# Altium PCB old_GR_Alim.PcbDoc
Units mm, origin at the board's own origin, x right, y up, seen from the top; angles counter-clockwise.
Board outline 70 x 80 mm, 2 copper layers (Top Layer, Bottom Layer); 65 components, 33 nets, 153 pads, 15 vias.
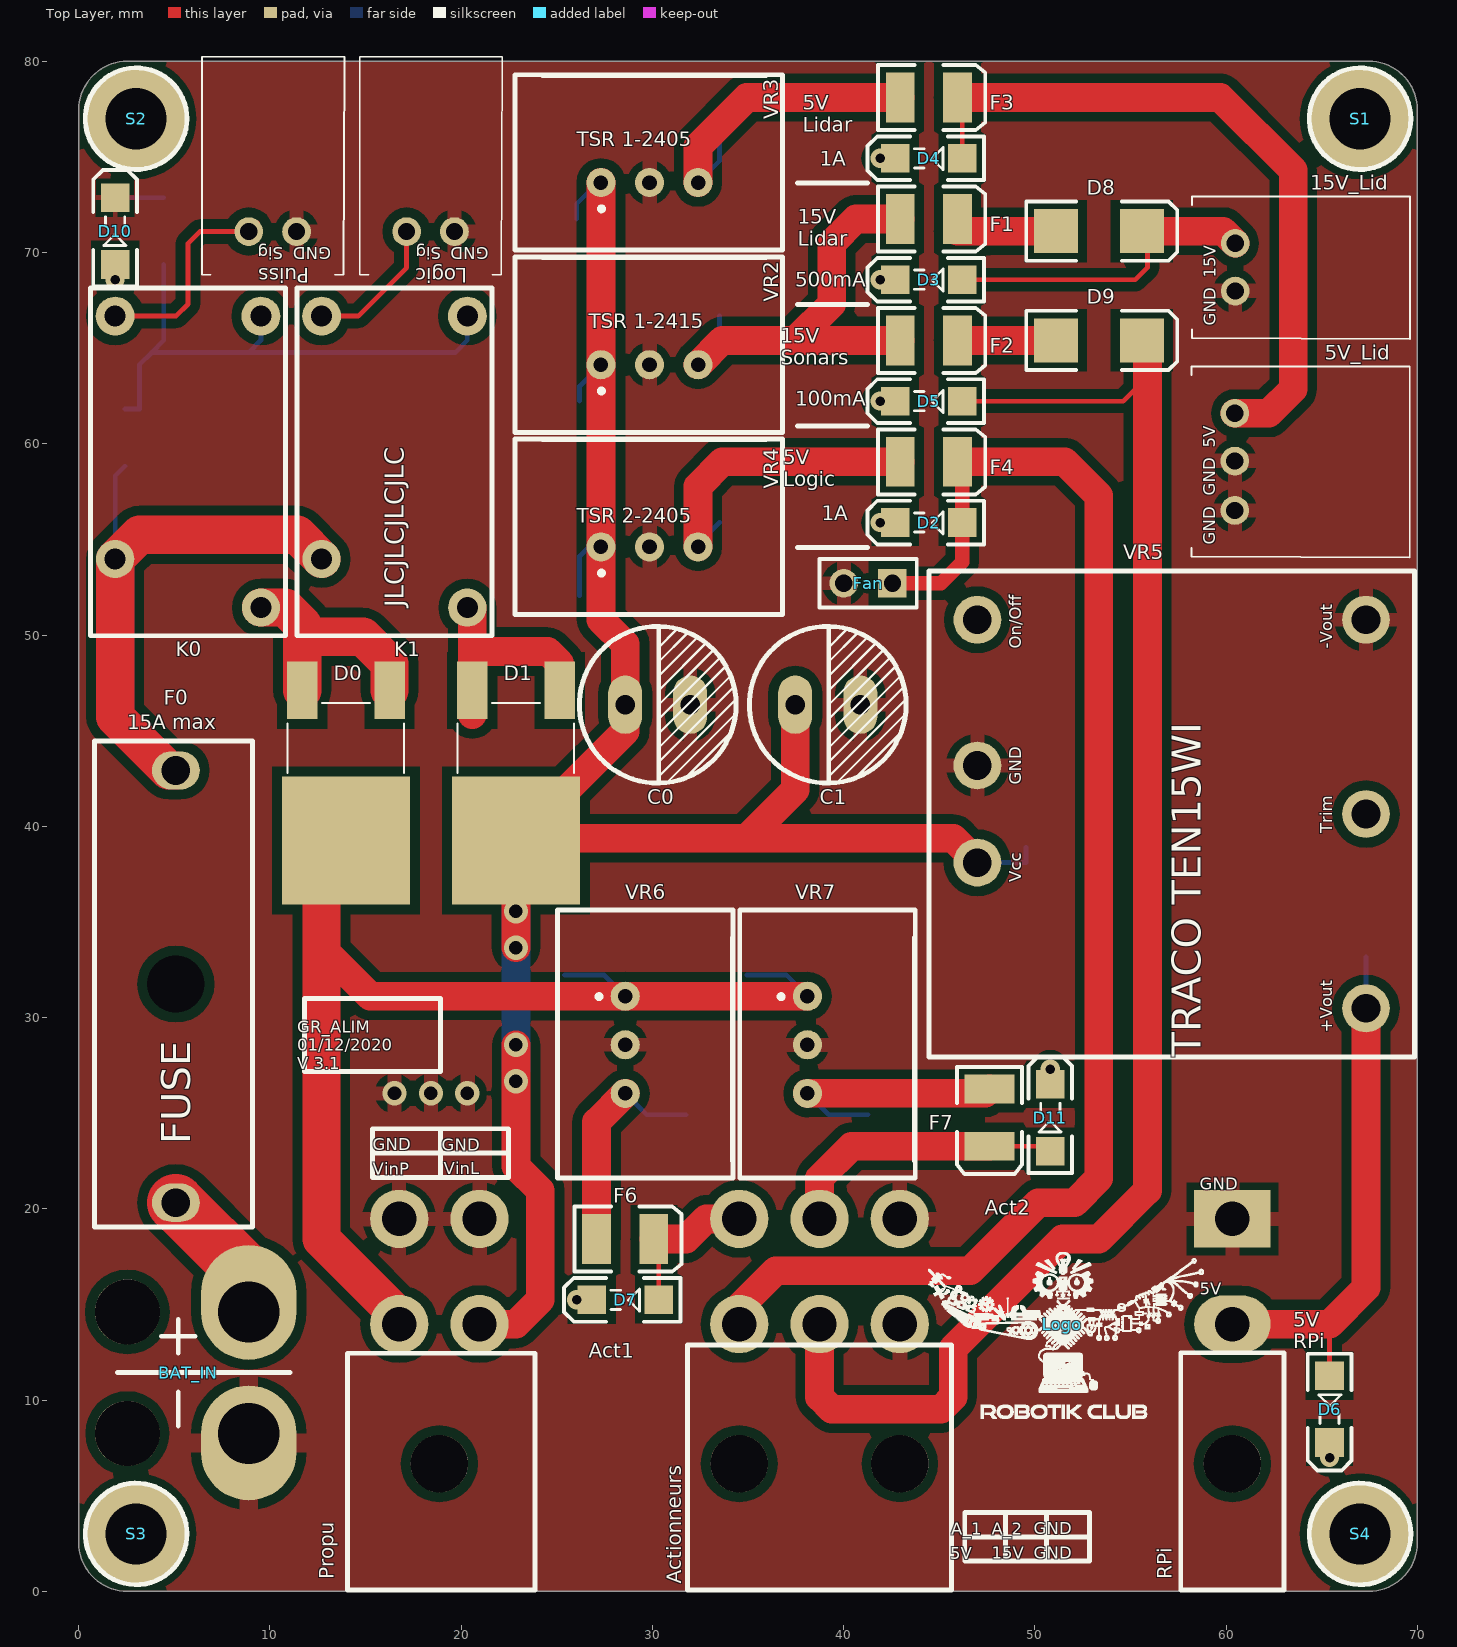
[diagram p0: Top Layer view]
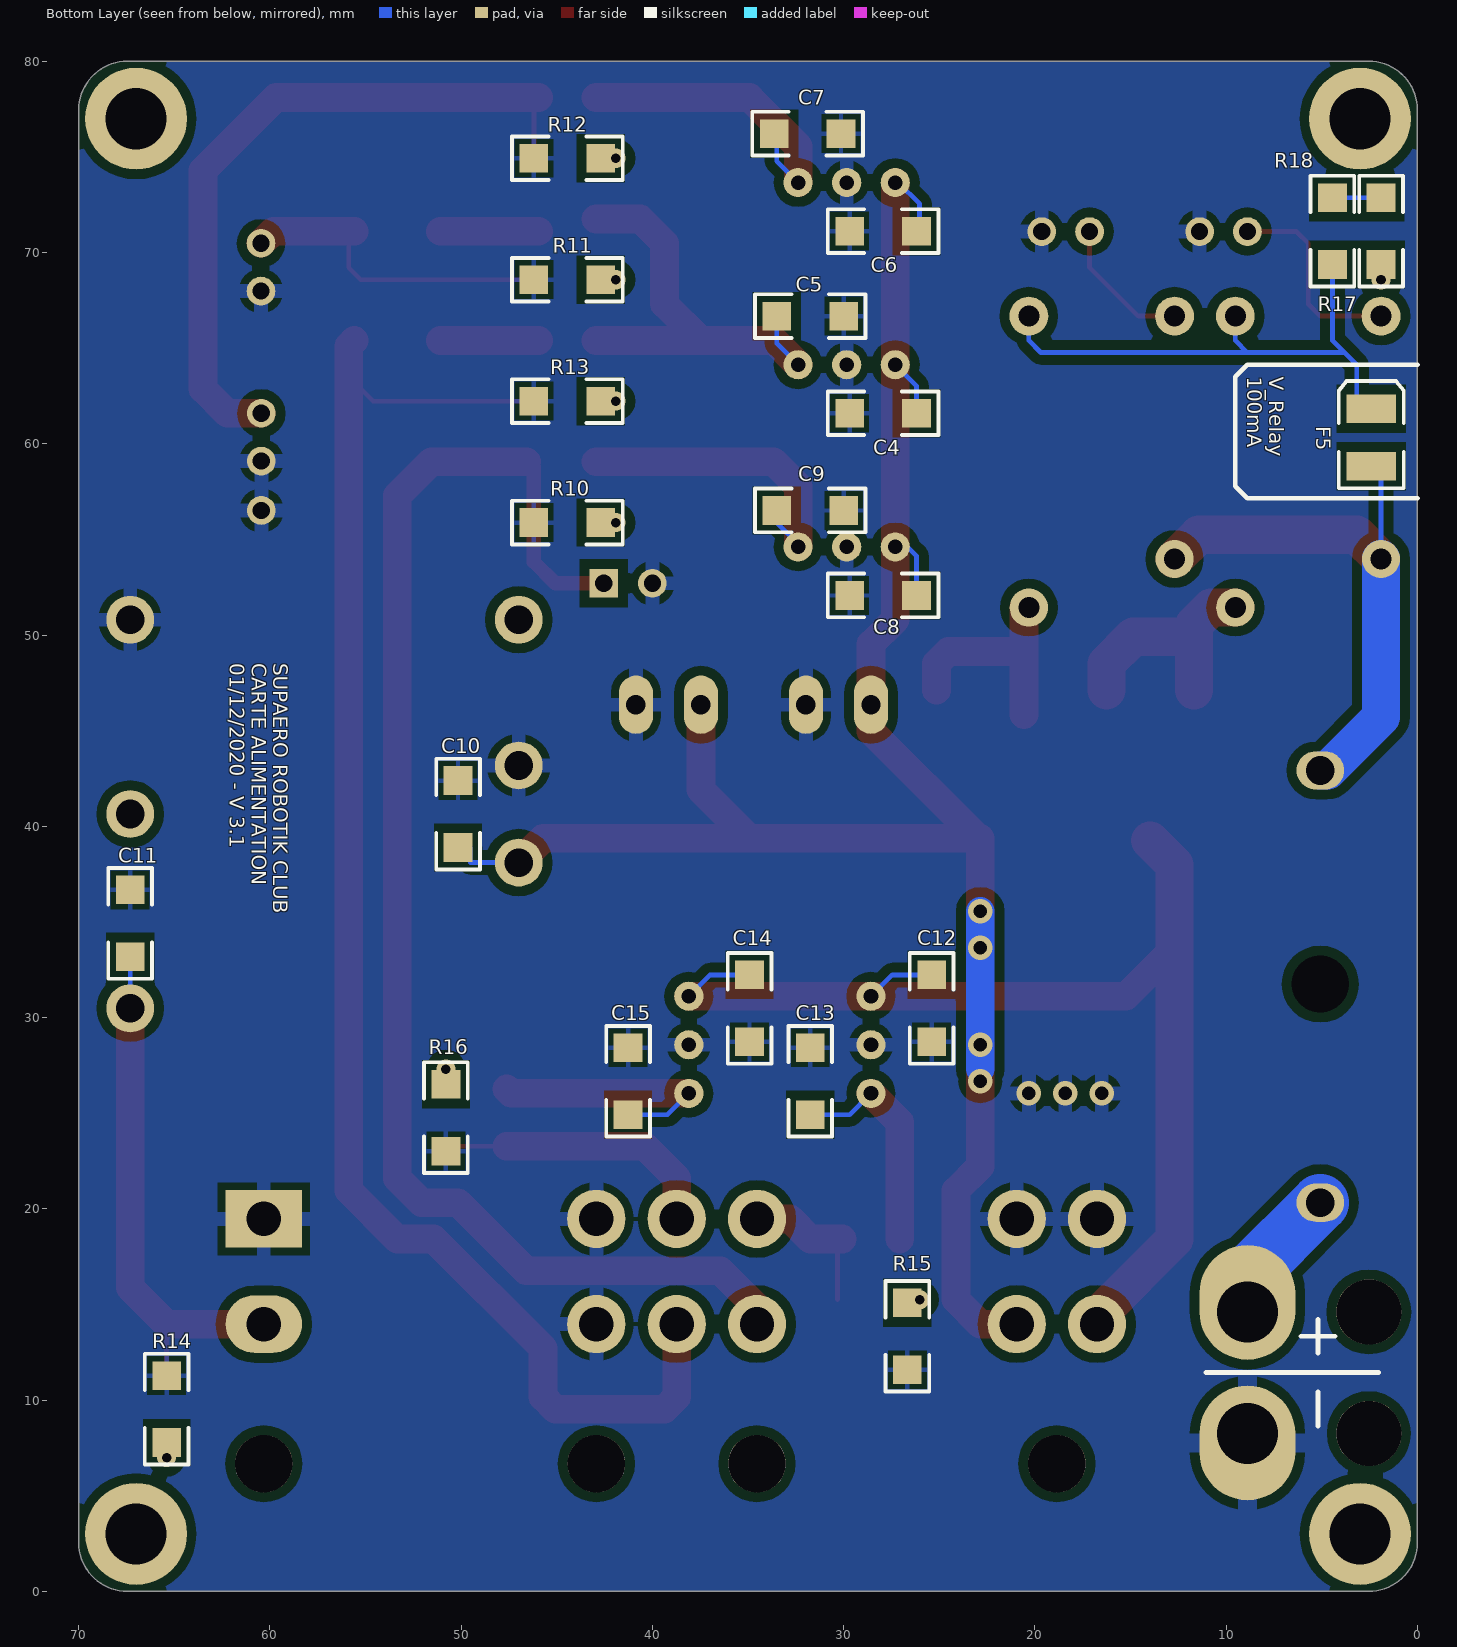
[diagram p1: Bottom Layer view, seen from below]

## Layer stack, top to bottom
Top Solder: solder mask 0.0102, Solder Resist, Dk 3.5
Top Layer: signal copper 0.0356
Dielectric 1: dielectric 0.32, FR-4, Dk 4.8
Bottom Layer: signal copper 0.0356
Bottom Solder: solder mask 0.0102, Solder Resist, Dk 3.5

## Board outline
32,0 67.46,0 ccw(c67.46,2.54) 70,2.54 70,14 70,77.46 ccw(c67.46,77.46) 67.46,80 50,80 2.54,80 ccw(c2.54,77.46) 0,77.46 0,35 0,2.54 ccw(c2.54,2.54) 2.54,0 32,0

## Design rules (kind name [scope] priority, off if disabled: settings)
Clearance [All] p1: gap=0.254 ignorepadtopadclearanceinfootprint=TRUE except(0.5: Arc-Poly Track-Poly SMDPad-Poly THPad-Poly Via-Poly Fill-Poly Poly-Poly Poly-Region Poly-Text)
ComponentClearance ComponentClearance_Logo [HasFootprint('Logo_Highres') Or  HasFootprint('Logo_lowres')] p1: gap=0 collisioncheckmode=3 verticalgap=0 showdistances=FALSE
ComponentClearance Bat [HasFootprint('Battery SALE')] p2: gap=0 collisioncheckmode=3 verticalgap=0 showdistances=FALSE
ComponentClearance Res [HasFootprint('3.2X1.6X1.1')] p3: gap=0 collisioncheckmode=3 verticalgap=0 showdistances=FALSE
ComponentClearance [All] p4: gap=0.254 collisioncheckmode=3 verticalgap=0.254 showdistances=FALSE
PlaneConnect [All] p1: planeconnectstyle=Relief reliefexpansion=0.5 reliefentries=4 reliefconductorwidth=0.5 reliefairgap=0.4
PolygonConnect PolygonConnect_Res [HasFootprint('KP-3216SEC') Or HasFootprint('Resistor 1206') Or HasFootprint('Capacitor 1206')] p1: connectstyle=Relief reliefconductorwidth=0.254 reliefentries=4 polygonreliefangle="90 Angle" airgapwidth=0.254
PolygonConnect PolygonConnect_Bat [HasFootprint('Battery SALE')] p2: connectstyle=Relief reliefconductorwidth=1 reliefentries=4 polygonreliefangle="90 Angle" airgapwidth=0.5
PolygonConnect PolygonConnect_1 [All] p3: connectstyle=Relief reliefconductorwidth=0.75 reliefentries=4 polygonreliefangle="90 Angle" airgapwidth=0.4
RoutingVias [All] p1: holewidth=0.711 width=1.27 viastyle="Through Hole" minholewidth=0.711 minwidth=1.27 maxholewidth=0.711 maxwidth=1.27
SilkToSilkClearance [All] p1 off: silktosilkclearance=0.254
SilkToSolderMaskClearance [IsPad] p1 off: minsilkscreentomaskgap=0.254 clearancetoexposedcopper=TRUE
SolderMaskExpansion [All] p1: expansion=0.102 istentingtop=FALSE
Width [All] p1: maxlimit=5 minlimit=0.25 preferedwidth=0.25
26 further rules are at their usual default settings.

## Classes and differential pairs
net class Power: 5V_L 5V_LID 5V_PI 15V_L 15V_LID 15V_S A_1 A_2 GND V_BAT V_REL VIN_L VIN_P

## Components (designator, comment, footprint, x,y, rotation, side; value= is the part's Value field where it differs from the comment)
5V_Lid "Header 3H" S3B-XH-A 60.452,61.595 r270 top
15V_Lid "Header 2H" S2B-XH-A 60.47,70.485 r270 top
Actionneurs "MinifitJr 3x2H" MOLEX_MINIFITJR_3X2H 38.735,13.97 r0 top
BAT_IN "Battery Onboard Solder" "BATTERY SALE" 8.89,8.255 r90 top
C0 "Cap2" CONDENSATEUR 28.575,46.355 r0 top
C1 "Cap2" CONDENSATEUR 37.465,46.355 r0 top
C4 "Cap" "Capacitor 1206" 27.94,61.595 r180 bottom
C5 "(optional)" "Capacitor 1206" 31.75,66.675 r0 bottom
C6 "Cap" "Capacitor 1206" 27.94,71.12 r180 bottom
C7 "(optional)" "Capacitor 1206" 31.889,76.217 r0 bottom
C8 "Cap" "Capacitor 1206" 27.94,52.07 r180 bottom
C9 "(optional)" "Capacitor 1206" 31.75,56.515 r0 bottom
C10 "Cap" "Capacitor 1206" 50.165,40.64 r270 bottom
C11 "Cap" "Capacitor 1206" 67.31,34.925 r270 bottom
C12 "Cap" "Capacitor 1206" 25.4,30.48 r90 bottom
C13 "(optional)" "Capacitor 1206" 31.75,26.67 r270 bottom
C14 "Cap" "Capacitor 1206" 34.925,30.48 r90 bottom
C15 "(optional)" "Capacitor 1206" 41.275,26.67 r270 bottom
D0 "FERD20S100SB-TR" FERD20H100SBTR 13.97,43.18 r90 top
D1 "FERD20S100SB-TR" FERD20H100SBTR 22.86,43.18 r90 top
D2 "5V_L" KP-3216SEC 44.45,55.88 r180 top
D3 "15V_Lid" KP-3216SEC 44.45,68.58 r180 top
D4 "5V_Lid" KP-3216SEC 44.45,74.93 r180 top
D5 "15V_S" KP-3216SEC 44.45,62.23 r180 top
D6 "5V_L" KP-3216SEC 65.405,9.525 r270 top
D7 "A_1" KP-3216SEC 28.575,15.24 r180 top
D8 "LGE SS12" SMB 53.34,71.12 r90 top
D9 "LGE SS12" SMB 53.34,65.405 r90 top
D10 "V_Rel" KP-3216SEC 1.905,71.12 r90 top
D11 "A_2" KP-3216SEC 50.8,24.765 r90 top
F0 "15A max" FUSE 5.08,20.32 r90 top
F1 "500mA" 3.5X2.8X1.9 44.45,71.755 r0 top
F2 "100mA" 3.5X2.8X1.9 44.45,65.405 r0 top
F3 "1A" 3.5X2.8X1.9 44.45,78.105 r0 top
F4 "1A" 3.5X2.8X1.9 44.45,59.055 r0 top
F5 "100mA" 3.5X2.8X1.9 2.413,60.325 r90 bottom
F6 "Fuse 2" 3.5X2.8X1.9 28.575,18.415 r0 top
F7 "Fuse 2" 3.5X2.8X1.9 47.625,24.765 r270 top
Fan "Header 2" HDR1X2 42.545,52.705 r180 top
K0 "Relay-SPST" Relay 5.715,59.055 r0 top
K1 "Relay-SPST" Relay 16.51,59.055 r0 top
Logic "S2B-XH-A-1_LF__SN_" S2B-XH-A 17.145,71.095 r0 top
Logo "Comment" Logo_lowres 51.435,13.97 r0 top
Propu "MinifitJr 2X2H" MOLEX_MINIFITJR_2X2H 20.955,13.97 r0 top
Puiss "S2B-XH-A-1_LF__SN_" S2B-XH-A 8.89,71.095 r0 top
R10 "Res2" "Resistor 1206" 44.45,55.88 r180 bottom
R11 "Res2" "Resistor 1206" 44.45,68.58 r180 bottom
R12 "Res2" "Resistor 1206" 44.45,74.93 r180 bottom
R13 "Res2" "Resistor 1206" 44.45,62.23 r0 bottom
R14 "Res2" "Resistor 1206" 65.405,9.525 r90 bottom
R15 "Res2" "Resistor 1206" 26.67,13.335 r270 bottom
R16 "Res2" "Resistor 1206" 50.8,24.765 r270 bottom
R17 "Res2" "Resistor 1206" 1.905,71.12 r270 bottom
R18 "Res2" "Resistor 1206" 4.445,71.12 r90 bottom
RPi "Header 2H" Molex_MiniFitJr_2x1H 60.325,13.97 r270 top
S1 "Screw M3" "Screw M3" 67,77 r0 top
S2 "Screw M3" "Screw M3" 3,77 r0 top
S3 "Screw M3" "Screw M3" 3,3 r0 top
S4 "Screw M3" "Screw M3" 67,3 r0 top
VR2 "TSR 1-2415" "TRS - Both" 27.305,64.135 r180 top
VR3 "TSR 1-2405" "TRS - Both" 27.305,73.66 r180 top
VR4 "TSR 2-2405" "TRS - Both" 27.305,54.61 r180 top
VR5 "THN15WI-2411" TRACO_1X1INCH 46.99,38.1 r90 top
VR6 "TSR 1-2405" "TRS - Both" 28.575,31.115 r90 top
VR7 "TSR 2-2405" "TRS - Both" 38.1,31.115 r90 top

## Footprints (in the part's own frame and the unit in brackets; to place one, negate y for a bottom-side part, rotate by r counter-clockwise, add the part's x,y. Pads: shape width x height; smd on the part's side, far side on the other; paste and mask are expansions set on the pad)
3.5X2.8X1.9 [mm] "SM LED; 2 C-Bend Leads; Body 3.5 x 2.8 x 1.9 mm, inc leads (LxWxH typ)"
  rect 1.5x2.6 smd: 1(-1.5,0) 2(1.5,0)
  silkscreen extent -2.65,-1.7 2.95,1.7
"BATTERY SALE" [mm] "Connecteur Batterie"
  round 3.4 hole 3.4: 0(0,6.35) 0(6.35,6.35)
  oval 6x5 hole 3.2 copper offset -0.5,0: 1(0,0)
  oval 6x5 hole 3.2 copper offset 0.5,0: 2(6.35,0)
  silkscreen extent 0.38,-2.16 5.97,6.86
"Capacitor 1206" [mm]
  rect 1.5x1.5 smd: 1(-1.75,0) 2(1.75,0)
  silkscreen extent -2.89,-1.14 2.89,1.14, body extent -1.98,-0.99 1.98,0.96, height 1.3
CONDENSATEUR [mil]
  oval 70x120 hole 40: 1(0,0) 2(133.86,0)
  silkscreen extent -94,-161 228,161, body extent -93,-160 227,160, height 500
FERD20H100SBTR [mm]
  rect 3x1.6 smd: 1(3.925,-2.286) 3(3.925,2.286)
  rect 6.7x6.7 smd: 2(-3.925,0)
  silkscreen extent -0.4,-3.05 3.27,3.05, body extent -4.99,-3.2 3.71,3.3, height 2.3
FUSE [mm] "Porte-fusible monté sur circuit 10 (UL) A, 6.3 (VDE) A, fusible Cartouche, 893-0574"
  round 2 hole 3: 0(11.43,0)
  oval 2x2.5 hole 1.5: 1(0,0) 2(22.6,0)
  silkscreen extent -1.27,-4 24.13,4.25, body extent -1.27,-4.29 24.13,4.29, height 11.41
HDR1X2 [mm] "Connector; Header; 2 Position"
  rect 1.5x1.5 hole 0.9: 1(0,0)
  round 1.5 hole 0.9: 2(2.54,0)
  silkscreen extent -1.27,-1.27 3.81,1.27
KP-3216SEC [mm]
  rect 1.5x1.5 smd: 1(-1.75,0) 2(1.75,0)
  silkscreen extent -2.89,-1.14 3.2,1.14, body extent -1.7,-0.79 1.5,0.81, height 1.1
Logo_lowres [mm]
  silkscreen extent -7.01,-4.93 7.39,3.76
Molex_MiniFitJr_2x1H [mm] "Connecteur Molex 2"
  rect 3x4 hole 1.8: 1(-5.5,0)
  oval 3x4 hole 1.8: 2(0,0)
  round 3 hole 3 unplated: 3(7.3,0)
  silkscreen extent 1.5,-2.7 13.9,2.7, body extent -6.03,-2.7 13.9,3.1, height 11.01
MOLEX_MINIFITJR_2X2H [mm] "MOLEX_MINIFITJR_3X2, 39-30-1060"
  round 3.048 hole 1.8: 1(-4.2,5.5) 2(-4.2,0) 3(0,5.5) 4(0,0)
  round 3 hole 3 unplated: 10(-2.1,-7.3)
  silkscreen extent -6.9,-13.9 2.9,-1.52, body extent -6.88,-13.9 3.12,6.03, height 11.4
MOLEX_MINIFITJR_3X2H [mm] "MOLEX_MINIFITJR_3X2H, 39-30-1060"
  round 3.048 hole 1.8: 1(-4.2,5.5) 2(-4.2,0) 3(0,5.5) 4(0,0) 5(4.2,5.5) 6(4.2,0)
  round 3 hole 3 unplated: 10(-4.2,-7.3) 11(4.2,-7.3)
  silkscreen extent -6.9,-13.9 6.9,-1.1, body extent -6.9,-13.9 7.3,6.04, height 11.41
Relay [mm] "SPST-NO Relay"
  round 2 hole 1.1: 1(3.81,-7.62) 2(-3.81,-5.08)
  round 2.032 hole 1.1: 3(-3.81,7.62) 4(3.81,7.62)
  silkscreen extent -5.09,-9.09 5.09,9.09, body extent -5.08,-9.14 5.08,9.14, height 15
"Resistor 1206" [mm]
  rect 1.5x1.5 smd: 1(-1.75,0) 2(1.75,0)
  silkscreen extent -2.89,-1.14 2.89,1.14, body extent -1.98,-0.95 1.98,0.93, height 0.55
S2B-XH-A [mm]
  round 1.5 hole 0.9: 1(0,0) 2(2.5,0)
  silkscreen extent -2.45,-2.26 5,9.14, body extent -2.41,-2.32 4.99,9.18, height 6.15
S3B-XH-A [mm]
  round 1.5 hole 0.9: 1(0,0) 2(2.5,0) 3(5.08,0)
  silkscreen extent -2.45,-2.26 7.54,9.14, body extent -2.44,-2.27 7.46,9.23, height 6.15
"Screw M3" [mm] "M3 iso Screw"
  round 5.32 hole 3.2 unplated: 0(0,0)
  silkscreen extent -2.66,-2.66 2.66,2.66
SMB [mm] "SMB Didoe"
  rect 2.3x2.3 smd: 1(0,2.25) 2(0,-2.25)
  silkscreen extent -1.55,-4.1 1.55,3.8, body extent -1.84,-2.67 1.78,2.62, height 2.2
TRACO_1X1INCH [mm]
  round 2.5 hole 1.5: 1(0,0) 2(5.08,0) 3(-7.62,-20.32) 4(2.54,-20.32) 5(12.7,-20.32) 6(12.7,0)
  silkscreen extent -10.16,-22.86 15.24,2.54, body extent -10.16,-22.86 15.24,2.54, height 10.11
"TRS - Both" [mil]
  round 60 hole 30: 1(0,0) 2(-100,0) 3(-200,0)
  silkscreen extent -374,-222 177,139, body extent -374,-157 177,138, height 398

## Part data
5V_Lid: "Header, 3-Pin, Right Angle"
15V_Lid RPi: "Header, 2-Pin, Right Angle"
Actionneurs: library part "Header 3X2H", "Header, 3-Pin, Dual row, Right Angle"
BAT_IN: library part "Header 2", "Header, 2-Pin"
C0 C1 C4 C6 C8 C10 C11 C12 C14: "Capacitor"
C5 C7 C9 C13 C15: library part Cap, "Capacitor"
D0 D1: "Diode"
D2 D3 D4 D5 D6 D7 D10 D11: library part LED2, "Typical RED, GREEN, YELLOW, AMBER GaAs LED"
D8 D9: library part Diode, "Default Diode"
F0: library part "Fuse 2", "Main Fuse"
F1 F3 F4 F5: library part "Fuse 2", "Fuse"
F2: library part "Fuse 2", "MICROSMD010F-2"
F6 F7: "Fuse"
Fan: "Header, 2-Pin"
K0 K1: "Single-Pole Single-Throw Relay"
Logic Puiss: "Connector"
Propu: library part "Header 2X2H", "Header, 2-Pin, Dual row, Right Angle"
R10 R11 R12 R13 R14 R15 R16 R17 R18: "Resistor"
VR2 VR3 VR4 VR6 VR7: library part "Volt Reg", "Voltage Regulator"
VR5: library part TEN60N, "TRACO THN15WI-2411"

## Via types
v1: diameter 1, hole 0.5, Top Layer to Bottom Layer, 8 vias
v2: diameter 1.27, hole 0.711, Top Layer to Bottom Layer, 7 vias

## Nets (pads, with @x,y where several pads share a name; then routed paths per layer and width w, separated by ;. In a path a pad name is that pad's centre, name@x,y a point inside that pad or via, vN(x,y) a via of type N, cw(c..) or ccw(c..) an arc to the next point about the centre after c; other vN are vias at no path point)
5V_L: Actionneurs.2 D2.1 F4.2 Fan.1 | length 74.8
  Top Layer w0.75: Fan.1 45.085,52.705 46.2,53.82 D2.1 F4.2@46.2,58.805
  Top Layer w1.5: Actionneurs.2 34.535,14.85 36.449,16.764 46.609,16.764 50.165,20.32 52.07,20.32 53.34,21.59 53.34,57.277 51.562,59.055 F4.2@46.585,59.055
5V_LID: 5V_Lid.1 D4.1 F3.2 | length 37.4
  Top Layer w0.25: F3.2 46.2,77.855 D4.1
  Top Layer w1.5: F3.2 59.69,78.105 63.5,74.295 63.5,62.865 62.23,61.595 5V_Lid.1
5V_PI: C11.2 D6.1 RPi.2 VR5.3 | length 27.8
  Top Layer w0.25: D6.1 65.405,13.97
  Top Layer w1.5: RPi.2 65.405,13.97 67.31,15.875 VR5.3
  Bottom Layer w0.25: VR5.3 C11.2
15V_L: C5.2 F1.1 F2.1 VR2.3 | length 24.1
  Top Layer w1.5: VR2.3 33.655,65.405 37.465,65.405 ; F2.1 37.465,65.405 ; F1.1 40.64,71.755 39.37,70.485 39.37,67.31 37.465,65.405
  Bottom Layer w0.25: VR2.3 33.5,65.25 C5.2
15V_LID: 15V_Lid.1 D3.1 D8.2 | length 17.1
  Top Layer w0.25: D3.1 55.245,68.58 55.88,69.215 55.88,70.83 D8.2
  Top Layer w1.5: D8.2 59.835,71.12 15V_Lid.1
15V_S: Actionneurs.4 D5.1 D9.2 | length 82.2
  Top Layer w0.25: D5.1 54.61,62.23 55.88,63.5
  Top Layer w1.5: Actionneurs.4 38.735,10.16 39.37,9.525 45.085,9.525 45.72,10.16 45.72,12.7 51.435,18.415 53.34,18.415 55.88,20.955 55.88,65.115 D9.2
A_1: Actionneurs.1 D7.1 F6.2 | length 7.8
  Top Layer w0.25: D7.1 F6.2@30.325,18.165
  Top Layer w1.5: F6.2 31.75,18.415 32.805,19.47 Actionneurs.1
A_2: Actionneurs.3 D11.1 F7.2 | length 14.6
  Top Layer w0.25: F7.2 D11.1@50.55,23.265
  Top Layer w1.5: Actionneurs.3 38.735,21.59 40.41,23.265 F7.2
GND: 5V_Lid.2 5V_Lid.3 15V_Lid.2 Actionneurs.5 Actionneurs.6 BAT_IN.1 C0.2 C1.2 C4.1 C5.1 C6.1 C7.1 C8.1 C9.1 C10.1 C11.1 C12.1 C13.1 C14.1 C15.1 D10.2 Fan.2 Logic.2 Propu.1 Propu.3 Puiss.2 R10.1 R11.1 R12.1 R13.2 R14.2 R15.2 R16.2 RPi.1 VR2.2 VR3.2 VR4.2 VR5.2 VR5.5 VR6.2 VR7.2
  other v2: 16.51,26.035 18.415,26.035 20.32,26.035
NetBAT_IN_2: BAT_IN.2 F0.1 | length 14.6
  Top Layer w0.5: BAT_IN.2 BAT_IN.2@8.89,16.51
  Top Layer w3: F0.1 BAT_IN.2@8.89,16.51
  Bottom Layer w3: F0.1 8.89,16.51 BAT_IN.2
NetC7_2: C7.2 F3.1 VR3.3 | length 16.5
  Top Layer w1.5: VR3.3 32.385,75.565 34.925,78.105 F3.1
  Bottom Layer w0.25: VR3.3 33.5,74.775 C7.2@33.5,76.2
NetC9_2: C9.2 F4.1 VR4.3 | length 16
  Top Layer w1.5: VR4.3 32.385,57.785 33.655,59.055 F4.1
  Bottom Layer w0.25: VR4.3@32.307,54.687 C9.2@33.5,55.88
NetC13_2: C13.2 F6.1 VR6.3 | length 11.9
  Top Layer w1.5: F6.1 27.075,24.535 VR6.3
  Bottom Layer w0.25: VR6.3 29.69,24.92 C13.2
NetC15_2: C15.2 F7.1 VR7.3 | length 13.3
  Top Layer w1.5: VR7.3 47.395,26.035 F7.1
  Bottom Layer w0.25: VR7.3 39.215,24.92 C15.2
NetD0_1: D0.1 D0.3 K0.1 | length 12.5
  Top Layer w2: K0.1 10.795,51.435 11.684,50.546 D0.3 ; 11.684,49.911 14.859,49.911 16.256,48.514 D0.1
NetD1_1: D1.1 D1.3 K1.1 | length 12.2
  Top Layer w1.5: K1.1 K1.1@20.574,51.204 ; D1.3@20.574,45.835 K1.1@20.574,51.435 ; 20.574,49.143 24.517,49.143 25.146,48.514 D1.1
NetD2_2: D2.2 R10.2
  other v1: 41.91,55.88
NetD3_2: D3.2 R11.2
  other v1: 41.91,68.58
NetD4_2: D4.2 R12.2
  other v1: 41.91,74.93
NetD5_2: D5.2 R13.1
  other v1: 41.91,62.23
NetD6_2: D6.2 R14.1
  other v1: 65.405,6.985
NetD7_2: D7.2 R15.1
  other v1: 26.035,15.24
NetD8_1: D8.1 F1.2 | length 5.1
  Top Layer w1.5: F1.2@45.95,71.12 D8.1
NetD9_1: D9.1 F2.2 | length 5.1
  Top Layer w1.5: F2.2 D9.1
NetD10_1: D10.1 R17.2
  other v1: 1.905,68.58
NetD11_2: D11.2 R16.1
  other v1: 50.8,27.305
NetK0_3: K0.3 Puiss.1 | length 11.3
  Top Layer w0.25: K0.3 5.08,66.675 5.715,67.31 5.715,70.485 6.325,71.095 Puiss.1 Puiss.1@9.348,71.552
NetK1_3: K1.3 Logic.1 | length 7.8
  Top Layer w0.25: K1.3 14.605,66.675 17.145,69.215 Logic.1@17.145,71.526
NetR17_1: R17.1 R18.2 | length 2.5
  Bottom Layer w0.25: R17.1 R18.2
V_BAT: F0.2 F5.1 K0.2 K1.2 | length 42.1
  Top Layer w2: F0.2 4.705,42.92 1.905,45.72 K0.2 3.175,55.245 11.43,55.245 K1.2
  Bottom Layer w0.25: K0.2 1.905,58.317 F5.1
  Bottom Layer w2: K0.2 1.905,45.72 4.705,42.92 F0.2
V_REL: F5.2 K0.4 K1.4 R18.1 | length 29
  Bottom Layer w0.25: F5.2 3.175,61.825 3.175,64.135 3.81,64.77 ; R18.1 4.445,65.405 3.81,64.77 ; K0.4 9.525,65.405 8.89,64.77 ; K1.4 20.32,65.405 19.685,64.77 8.89,64.77 ; 3.81,64.77 8.89,64.77
VIN_L: C0.1 C1.1 C4.2 C6.2 C8.2 C10.2 D1.2 Propu.4 VR2.1 VR3.1 VR4.1 VR5.1 | length 112.8
  Top Layer w1.5: Propu.4 22.86,13.97 24.13,15.24 24.13,20.955 22.86,22.225 v2(22.86,28.575) ; v2(22.86,33.655) D1.2 D1.2@22.975,39.37 ; D1.2@22.86,39.37 D1.2@22.975,39.37 ; VR3.1 27.305,50.8 28.575,49.53 C0.1 28.575,44.97 D1.2@22.975,39.37 ; C1.1 37.465,41.91 34.925,39.37 ; VR5.1 45.72,39.37 34.925,39.37 ; D1.2@22.975,39.37 34.925,39.37
  Bottom Layer w0.25: C6.2@26.035,71.755 26.035,72.545 VR3.1@27.15,73.66 ; C8.2 26.19,54.13 26.67,54.61 VR4.1 ; C4.2@26.19,62.23 26.19,63.02 VR2.1 ; VR5.1 49.53,38.1 C10.2@49.53,38.89
  Bottom Layer w1.5: 22.86,27.305 v2(22.86,35.56)
  other v2: 22.86,26.67
VIN_P: C12.2 C14.2 D0.2 Propu.2 VR6.1 VR7.1 | length 60.5
  Top Layer w1.5: 12.7,33.655 15.24,31.115 VR6.1 VR7.1
  Top Layer w2: D0.2 12.7,37.985 12.7,33.655 12.7,18.415 Propu.2@16.51,14.605
  Bottom Layer w0.25: C12.2 27.46,32.23 VR6.1 ; C14.2 36.985,32.23 VR7.1
pads on no net: Actionneurs.10 Actionneurs.11 BAT_IN.0 F0.0 Propu.10 RPi.3 S1.0 S2.0 S3.0 S4.0 VR5.4 VR5.6

## Polygon pours and split planes (outlines as drawn)
GND on Top Layer "Top GND" (solid, pour order 4): 36.83,0 67.46,0 ccw(c67.46,2.54) 70,2.54 70,29 70,77.46 ccw(c67.46,77.46) 67.46,80 49,80 2.54,80 ccw(c2.54,77.46) 0,77.46 0,48 0,2.54 ccw(c2.54,2.54) 2.54,0 21,0
GND on Bottom Layer "Bot GND" (solid, remove dead copper, pour order 6): 36.83,0 67.46,0 ccw(c67.46,2.54) 70,2.54 70,29 70,77.46 ccw(c67.46,77.46) 67.46,80 49,80 2.54,80 ccw(c2.54,77.46) 0,77.46 0,48 0,2.54 ccw(c2.54,2.54) 2.54,0 21,0

## Silkscreen, mask and mechanical layers (free items; w line width, h text height)
Top Overlay:
  lines w0.254: 15.367,22.911 22.479,22.911 ; 18.923,21.641 18.923,24.181 ; 37.592,54.585 41.25,54.585 ; 37.592,60.935 41.25,60.935 ; 37.592,67.285 41.25,67.285 ; 37.592,73.635 41.25,73.635 ; 46.33,2.845 52.705,2.845 ; 48.463,1.575 48.463,4.115 ; 50.597,1.575 50.597,4.115 ; 11.811,27.178 11.811,30.988 18.923,30.988 18.923,27.178 11.811,27.178 ; 15.367,21.641 15.367,24.181 22.479,24.181 22.479,21.641 15.367,21.641 ; 46.33,1.575 52.857,1.575 52.857,4.115 46.33,4.115 46.33,1.575
  text "5V / Lidar" at 37.846,76.327 h0.76
  text "15V / Lidar" at 37.592,70.358 h0.76
  text "Sig" at 10.693,70.282 h0.64 r180
  text "GND" at 13.193,70.282 h0.64 r180
  text "Sig" at 18.948,70.282 h0.64 r180
  text "GND" at 21.448,70.282 h0.64 r180
  text "15V" at 59.454,68.682 h0.64 r90
  text "GND" at 59.454,66.182 h0.64 r90
  text "15V / Sonars" at 36.703,64.135 h0.76
  text "5V" at 59.436,59.792 h0.64 r90
  text "5V / Logic" at 36.83,57.785 h0.76
  text "GND" at 59.436,57.292 h0.64 r90
  text "GND" at 59.436,54.712 h0.64 r90
  text "JLCJLCJLCJLC" at 17,51.445 h1 r90
  text "GR_ALIM / 01/12/2020 / V 3.1" at 11.43,27.305 h0.64
  text "GND" at 15.367,23.063 h0.64
  text "GND" at 18.974,23.038 h0.64
  text "VinL" at 19.075,21.793 h0.64
  text "VinP" at 15.367,21.768 h0.64
  text "GND" at 58.623,20.994 h0.64
  text "Act2" at 47.371,19.685 h0.76
  text "5V" at 58.623,15.494 h0.64
  text "5V / RPi" at 63.5,12.7 h0.76
  text "Act1" at 26.67,12.22 h0.76
  text "GND" at 49.936,2.972 h0.64
  text "A_1" at 45.618,2.946 h0.64
  text "A_2" at 47.752,2.946 h0.64
  text "15V" at 47.752,1.702 h0.64
  text "GND" at 49.936,1.702 h0.64
  text "5V" at 45.568,1.676 h0.64
Bottom Overlay:
  lines w0.254: 0,57.15 8.89,57.15 9.525,57.785 9.525,63.5 8.89,64.135 0,64.135
  text "V_Relay / 100mA" at 8.89,63.5 h0.76 r90
  text "SUPAERO ROBOTIK CLUB / CARTE ALIMENTATION / 01/12/2020 - V 3.1" at 62.103,48.514 h0.76 r90
Mechanical 2:
  lines w0.254: 0,3 ccw(c3,3) 3,0 67,0 ccw(c67,3) 70,3 70,77 ccw(c67,77) 67,80 3,80 ccw(c3,77) 0,77 0,3

## Dimensions
70,14 to 0,35 on Mechanical 3
3,80 to 32,0 on Mechanical 3

## Text inside footprints (layer, text, board x,y; h text height)
F0: Top Overlay "FUSE" at 5.842,23.368 h1.52 r90
VR5: Top Overlay "TRACO TEN15WI" at 58.674,27.94 h1.52 r90; Top Overlay "On/Off" at 49.276,49.276 h0.64 r90; Top Overlay "GND" at 49.276,42.164 h0.64 r90; Top Overlay "Vcc" at 49.276,37.084 h0.64 r90; Top Overlay "-Vout" at 65.532,49.276 h0.64 r90; Top Overlay "Trim" at 65.532,39.624 h0.64 r90; Top Overlay "+Vout" at 65.532,29.21 h0.64 r90